# Altium PCB BoardBox.PcbDoc
Units mm, origin at the board's own origin, x right, y up, seen from the top; angles counter-clockwise.
Board outline 152.4 x 101.6 mm, 2 copper layers (Top Layer, Bottom Layer), stack 1.671 mm thick; 6 components, 79 nets, 97 pads, 92 vias.
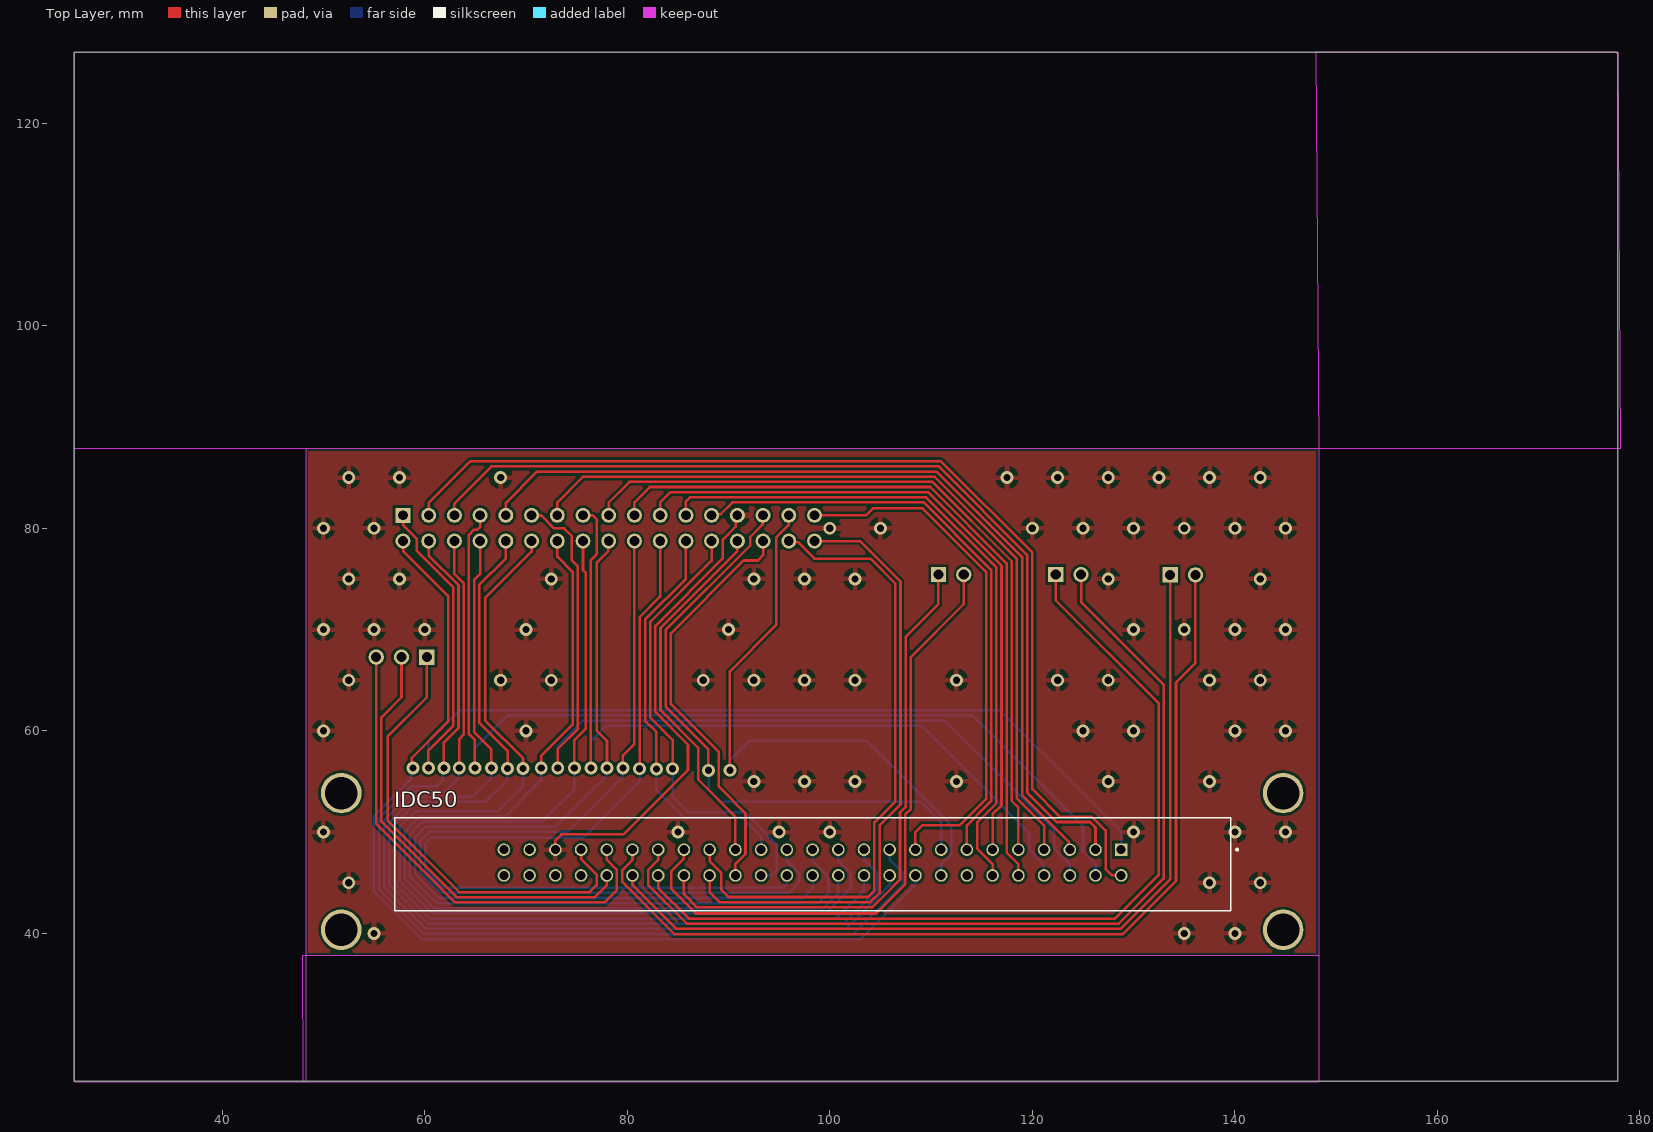
[diagram p0: Top Layer view]
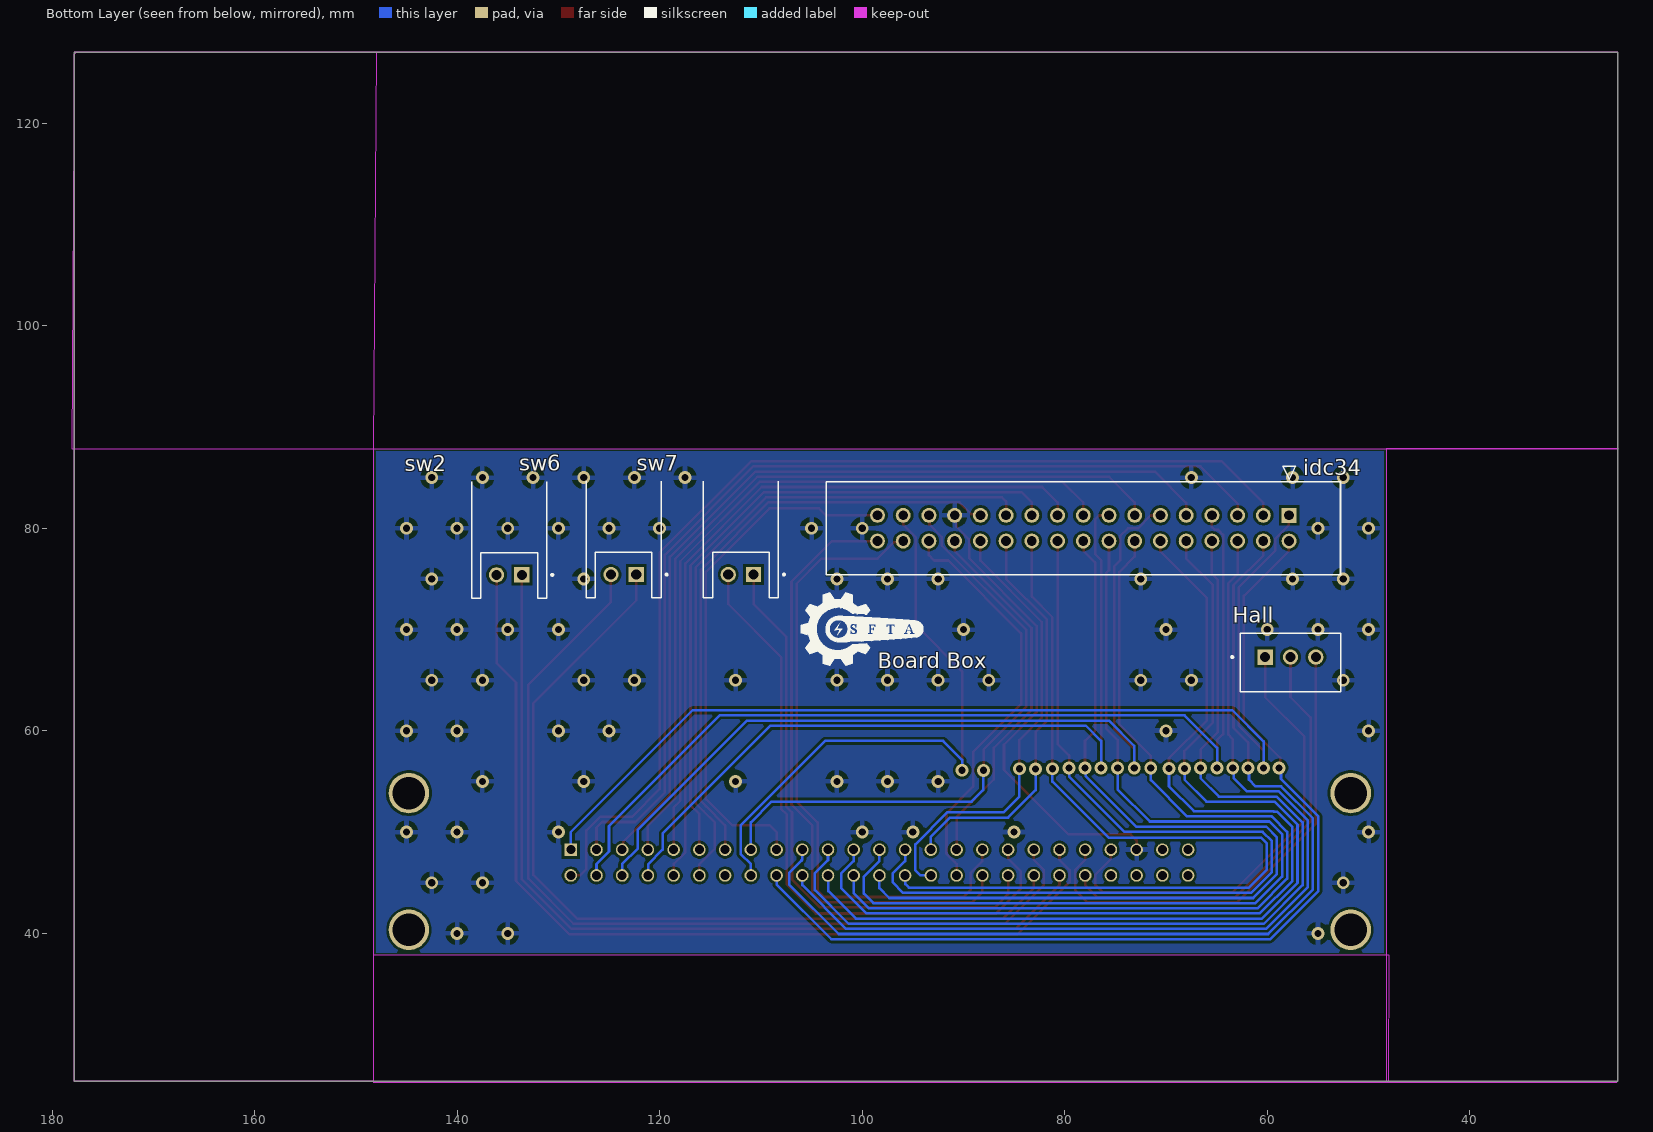
[diagram p1: Bottom Layer view, seen from below]
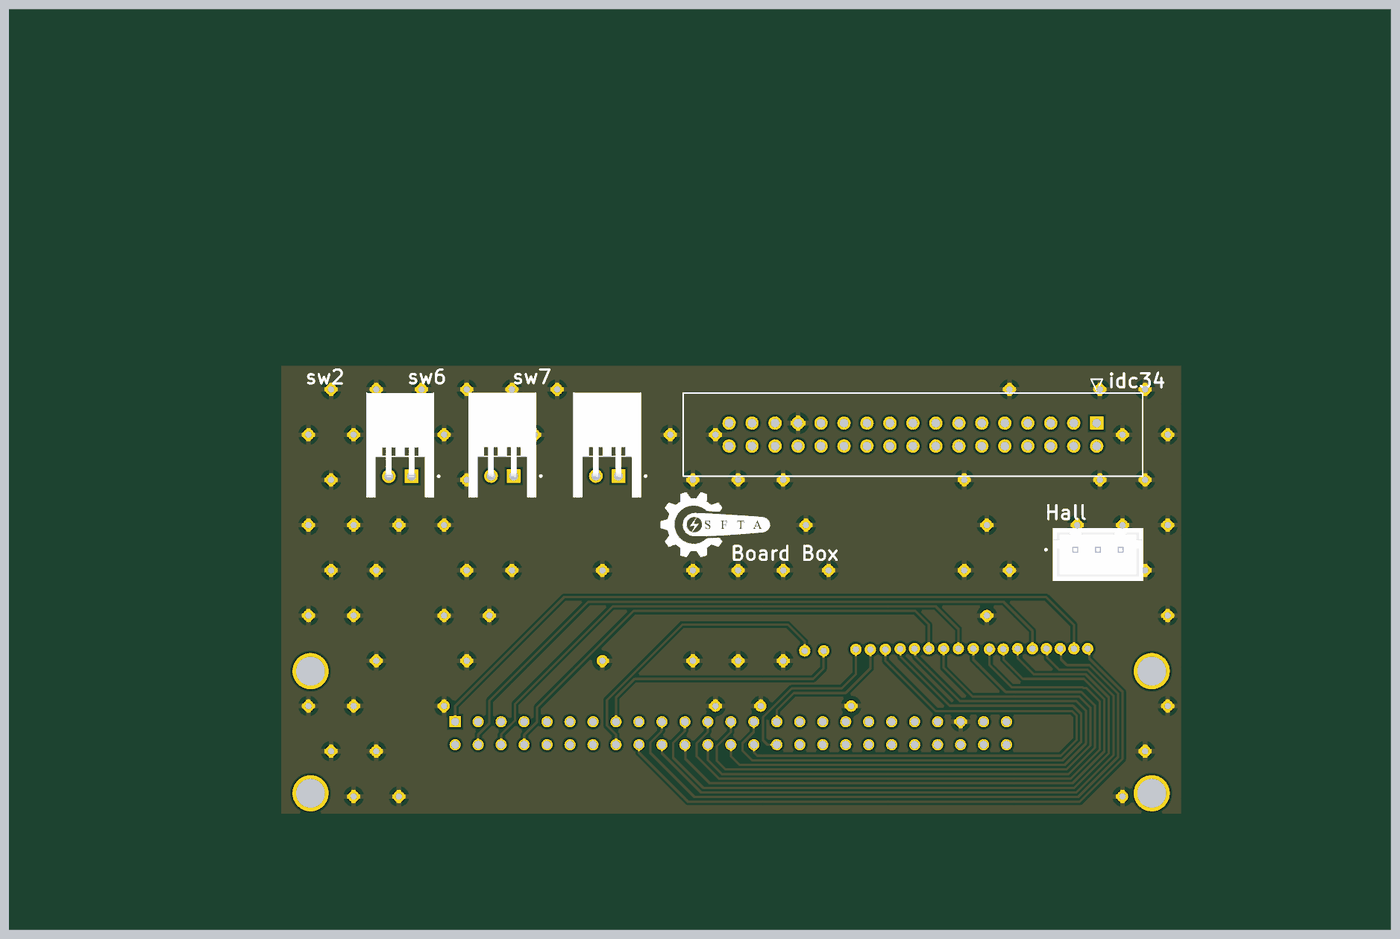
[diagram p2: 3D render of the assembled board from below, using the file's embedded part models]

## Layer stack, top to bottom
Top Solder: solder mask 0.0102, Solder Resist, Dk 3.5
Top Layer: signal copper 0.0356
Dielectric 1: dielectric 1.6, FR-4, Dk 4.8
Bottom Layer: signal copper 0.0356
Bottom Solder: solder mask 0.0102, Solder Resist, Dk 3.5

## Board outline
25.4,25.4 177.8,25.4 177.8,127 25.4,127
cut-out: 148.266,87.852 148.266,25.427 148.293,25.4 177.8,25.4 177.8,126.806 177.606,127 148,127
cut-out: 178.066,87.852 25.366,87.852 25.36,87.858 25.4,87.898 25.4,127 177.8,127
cut-out: 48.266,87.852 48.266,25.292 25.508,25.292 25.4,25.4 25.4,87.898
cut-out: 47.974,37.852 148.266,37.852 148.266,25.292 48.03,25.292

## Design rules (kind name [scope] priority, off if disabled: settings)
AssemblyTestPointUsage [All] p1: isadvanced=TRUE
AssemblyTestpoint [All] p1: isadvanced=TRUE testpointundercomponent=TRUE minsize=1.016 maxsize=2.54 preferedsize=1.524 minholesize=0 maxholesize=1.016 preferedholesize=0.813 testpointgrid=0.025 usegrid=TRUE gridtolerance=0 allowsidetop=TRUE allowsidebottom=TRUE
Clearance Clearance_1 [OnMid vs OnMid] p1: gap=0.254 ignorepadtopadclearanceinfootprint=FALSE sourcerule=37 cellrowname=All cellrowtype=0 cellcolname=All cellcoltype=0 innerlayers=TRUE
Clearance Clearance_2 [(ExistsOnLayer('Top Layer') Or ExistsOnLayer('Bottom Layer')) vs (ExistsOnLayer('Top Layer') Or ExistsOnLayer('Bottom Layer'))] p2: gap=0.254 ignorepadtopadclearanceinfootprint=FALSE sourcerule=37 cellrowname=All cellrowtype=0 cellcolname=All cellcoltype=0 outerlayers=TRUE
Clearance [All] p3: gap=0.254 ignorepadtopadclearanceinfootprint=FALSE ismatrix=TRUE
ComponentClearance [All] p1: isadvanced=TRUE gap=0.254 collisioncheckmode=3 verticalgap=0.254 showdistances=FALSE
FabricationTestPointUsage [All] p1: isadvanced=TRUE valid=0 allowmultiple=FALSE
FabricationTestpoint [All] p1: isadvanced=TRUE side=3 testpointundercomponent=TRUE minsize=1.016 maxsize=2.54 preferedsize=1.524 minholesize=0 maxholesize=1.016 preferedholesize=0.813 testpointgrid=0.025 allowsidetop=TRUE allowsidebottom=TRUE usegrid=TRUE gridtolerance=0
FanoutControl Fanout_BGA [IsBGA] p1: isadvanced=TRUE bgadir=Out bgaviamode=Centered fanoutstyle=Auto fanoutdirection=Alternating viagrid=0.025 // Fanout_BGA (Default Rule)
FanoutControl Fanout_LCC [IsLCC] p2: isadvanced=TRUE bgadir=Out bgaviamode=Centered fanoutstyle=Auto fanoutdirection=Alternating viagrid=0.025 // Fanout_LCC (Default Rule)
FanoutControl Fanout_SOIC [IsSOIC] p3: isadvanced=TRUE bgadir=Out bgaviamode=Centered fanoutstyle=Auto fanoutdirection=Alternating viagrid=0.025 // Fanout_SOIC (Default Rule)
FanoutControl Fanout_Small [(CompPinCount < 5)] p4: isadvanced=TRUE bgadir=Out bgaviamode=Centered fanoutstyle=Auto fanoutdirection=OutThenIn viagrid=0.025 // Fanout_Small (Default Rule)
FanoutControl Fanout_Default [All] p5: isadvanced=TRUE bgadir=Out bgaviamode=Centered fanoutstyle=Auto fanoutdirection=Alternating viagrid=0.025 // Fanout_Default (Default Rule)
Height [All] p1: isadvanced=TRUE minheight=0 maxheight=25.4 prefheight=12.7
HoleSize [All] p1: isadvanced=TRUE absolutevalues=TRUE maxlimit=2.54 minlimit=0.4 maxpercent=80.000 minpercent=20.000
HoleToHoleClearance [All] p1: isadvanced=TRUE gap=0.254 allowstackedmicrovias=TRUE
LayerPairs [All] p1: isadvanced=TRUE enforce=TRUE
MinimumSolderMaskSliver [All] p1: isadvanced=TRUE minsoldermaskwidth=0.254
NetAntennae [All] p1: isadvanced=TRUE netantennaetolerance=0
PasteMaskExpansion [All] p1: isadvanced=TRUE expansion=0
PlaneClearance [All] p1: isadvanced=TRUE clearance=0.508
PlaneConnect [All] p1: isadvanced=TRUE planeconnectstyle=Relief reliefexpansion=0.508 reliefentries=4 reliefconductorwidth=0.254 reliefairgap=0.254
PolygonConnect [All] p1: connectstyle=Relief reliefconductorwidth=0.5 reliefentries=4 polygonreliefangle="90 Angle" airgapwidth=0.5
RoutingCorners [All] p1: isadvanced=TRUE cornerstyle=45-Degree minsetback=2.54 maxsetback=2.54
RoutingPriority [All] p1: isadvanced=TRUE routingpriority=0
RoutingVias [All] p1: holewidth=0.711 width=1.27 viastyle="Through Hole" minholewidth=0.711 minwidth=1.27 maxholewidth=0.711 maxwidth=1.27
ShortCircuit [All] p1: isadvanced=TRUE allowed=FALSE
SilkToSilkClearance [All] p1: isadvanced=TRUE silktosilkclearance=0.254
SilkToSolderMaskClearance [IsPad] p1: isadvanced=TRUE minsilkscreentomaskgap=0.254 clearancetoexposedcopper=TRUE
SolderMaskExpansion [All] p1: isadvanced=TRUE expansion=0.102 istentingtop=FALSE
SupplyNets "Schematic Supply Nets" [InNet('+12')] p1: isadvanced=TRUE voltage=0.000
UnRoutedNet [All] p1: isadvanced=TRUE
UnpouredPolygon [All] p1: isadvanced=TRUE
Width [All] p1: maxlimit=0.254 minlimit=0.254 preferedwidth=0.254
4 further rules are at their usual default settings.

## Classes and differential pairs
component class U_ZK-SJ20: zk
component class U_dc_to_dc: dc_dc
component class U_BordBox: Hall idc34 IDC50

## Components (designator, comment, footprint, x,y, rotation, side; value= is the part's Value field where it differs from the comment)
Hall "B3B-XH-A" JST_B3B-XH-A 57.709,66.753 r0 bottom
idc34 "1-1761608-1" TYCO_1-1761608-1 57.852,78.74 r180 bottom
IDC50 "1-1761686-5" TE_1-1761686-5 128.778,48.26 r180 top
sw2 "S2B-XH-A" JST_S2B-XH-A 134.857,81.102 r0 bottom
sw6 "S2B-XH-A" JST_S2B-XH-A 123.561,81.129 r0 bottom
sw7 "S2B-XH-A" JST_S2B-XH-A 111.975,81.129 r0 bottom

## Footprints (in the part's own frame and the unit in brackets; to place one, negate y for a bottom-side part, rotate by r counter-clockwise, add the part's x,y. Pads: shape width x height; smd on the part's side, far side on the other; paste and mask are expansions set on the pad)
JST_B3B-XH-A [mm]
  rect 1.508x1.508 / inner round 1.508 / far side rect 1.508x1.508 hole 1: 1(2.5,-0.525)
  round 1.508 hole 1: 2(0,-0.525) 3(-2.5,-0.525)
  silkscreen extent -4.95,-2.88 5.85,2.87, body extent -4.95,-2.88 4.95,2.88, height 7
JST_S2B-XH-A [mm]
  rect 1.508x1.508 / inner round 1.508 / far side rect 1.508x1.508 hole 1: 1(-1.25,5.7)
  round 1.508 hole 1: 2(1.25,5.7)
  silkscreen extent -4.35,-3.5 3.7,8, body extent -3.7,-3.5 3.7,8, height 6.1
TE_1-1761686-5 [mm]
  rect 1.24x1.24 hole 0.89: 1(0,0)
  round 1.24 hole 0.89: 2(0,2.54) 3(2.54,0) 4(2.54,2.54) 5(5.08,0) 6(5.08,2.54) 7(7.62,0) 8(7.62,2.54) 9(10.16,0) 10(10.16,2.54) 11(12.7,0) 12(12.7,2.54) 13(15.24,0) 14(15.24,2.54) 15(17.78,0) 16(17.78,2.54) 17(20.32,0) 18(20.32,2.54) 19(22.86,0) 20(22.86,2.54) 21(25.4,0) 22(25.4,2.54) 23(27.94,0) 24(27.94,2.54) 25(30.48,0) 26(30.48,2.54) 27(33.02,0) 28(33.02,2.54) 29(35.56,0) 30(35.56,2.54) 31(38.1,0) 32(38.1,2.54) 33(40.64,0) 34(40.64,2.54) 35(43.18,0) 36(43.18,2.54) 37(45.72,0) 38(45.72,2.54) 39(48.26,0) 40(48.26,2.54) 41(50.8,0) 42(50.8,2.54) 43(53.34,0) 44(53.34,2.54) 45(55.88,0) 46(55.88,2.54) 47(58.42,0) 48(58.42,2.54) 49(60.96,0) 50(60.96,2.54)
  silkscreen extent -11.55,-3.18 71.75,6.04
TYCO_1-1761608-1 [mil]
  rect 58x58 / inner round 58 / far side rect 58x58 hole 38 mask+4.02: 1(0,100)
  round 58 hole 38 mask+4.02: 2(0,0) 3(-100,100) 4(-100,0) 5(-200,100) 6(-200,0) 7(-300,100) 8(-300,0) 9(-400,100) 10(-400,0) 11(-500,100) 12(-500,0) 13(-600,100) 14(-600,0) 15(-700,100) 16(-700,0) 17(-800,100) 18(-800,0) 19(-900,100) 20(-900,0) 21(-1000,100) 22(-1000,0) 23(-1100,100) 24(-1100,0) 25(-1200,100) 26(-1200,0) 27(-1300,100) 28(-1300,0) 29(-1400,100) 30(-1400,0) 31(-1500,100) 32(-1500,0) 33(-1600,100) 34(-1600,0)
  silkscreen extent -1800,-131 200,291

## Part data
Hall: "Connector Header Through Hole 3 position 0.098 (2.50mm)", Package=None, Check_prices=https://www.snapeda.com/parts/B3B-XH-A/JST+Sales+America+Inc./view-part/?ref=eda, MF="JST Sales", MP=B3B-XH-A, SnapEDA_Link=https://www.snapeda.com/parts/B3B-XH-A/JST+Sales+America+Inc./view-part/?ref=snap
idc34: "IDC LOW PRO HDR 34P VERT SHT L", Package=None, Check_prices=https://www.snapeda.com/parts/117616081/TE+Connectivity/view-part/?ref=eda, MF="TE Connectivity", MP=117616081, SnapEDA_Link=https://www.snapeda.com/parts/117616081/TE+Connectivity/view-part/?ref=snap
IDC50 sw2 sw6 sw7: Package=None, Availability=Unavailable, Price=None
  IDC50: MP=1-1761686-5
  sw2 sw6 sw7: MP=S2B-XH-A

## Free pads (board coordinates)
  round 4 hole 3.2: ""(51.766,40.352) ""(51.766,53.852) ""(144.766,40.352) ""(144.766,53.852)

## Via types
v1: diameter 1.27, hole 0.711, Top Layer to Bottom Layer, 92 vias

## Nets (pads, with @x,y where several pads share a name; then routed paths per layer and width w, separated by ;. In a path a pad name is that pad's centre, name@x,y a point inside that pad or via, vN(x,y) a via of type N, cw(c..) or ccw(c..) an arc to the next point about the centre after c; other vN are vias at no path point)
1: idc34.1 IDC50.1 | length 107.1
  Top Layer w0.254: idc34.1 57.872,81.26 57.872,80.311 59.21,78.973 59.21,77.79 62.83,74.17 62.83,60.508 60.368,58.045 v1(60.368,56.334)
  Bottom Layer w0.254: v1(60.368,56.334) 60.368,58.958 63.442,62.032 116.746,62.032 128.778,50 IDC50.1
2: idc34.3 IDC50.2 | length 104.2
  Top Layer w0.254: idc34.3 60.392,82.516 64.49,86.614 110.972,86.614 120,77.586 120,54.234 122.726,51.508 125.887,51.508 127.239,50.156 127.239,46.34 127.859,45.72 IDC50.2
3: idc34.5 IDC50.3 | length 96.7
  Top Layer w0.254: idc34.5 62.932,82.442 66.596,86.106 110.761,86.106 119.492,77.375 119.492,53.895 122.387,51 125.676,51 126.238,50.438 IDC50.3
4: idc34.7 IDC50.4 | length 98.8
  Top Layer w0.254: v1@64.954,56.648 64.954,59.085 64.354,59.685 64.354,79.34 64.872,79.858 65.202,79.858 65.472,80.128 idc34.7
  Bottom Layer w0.254: v1(64.954,56.341) 64.954,58.324 68.154,61.524 114.069,61.524 125,50.593 125,48.082 126.238,46.844 IDC50.4
5: idc34.9 IDC50.5 | length 87.8
  Top Layer w0.254: idc34.9 68.012,82.516 71.094,85.598 110.551,85.598 118.984,77.165 118.984,53.655 123.585,49.054 123.585,48.373 IDC50.5
6: idc34.11 IDC50.6 | length 91.1
  Top Layer w0.254: idc34.11 70.573,81.259 71.521,81.259 72.779,80 73.777,80 74.508,79.269 74.508,76.856 75.124,76.24 75.124,60.183 73.139,58.198 v1(73.139,56.341)
  Bottom Layer w0.254: v1@73.139,55.935 73.139,58.517 75.638,61.016 111.383,61.016 122.159,50.24 122.159,48.383 123.698,46.844 IDC50.6
7: idc34.13 IDC50.7 | length 80.9
  Top Layer w0.254: idc34.13 73.092,82.55 75.632,85.09 110.34,85.09 118.476,76.954 118.476,53.33 121.158,50.648 IDC50.7
8: idc34.15 IDC50.8 | length 82
  Top Layer w0.254: idc34.15 75.651,81.261 76.601,81.261 77,80.862 77,77.444 76.412,76.856 v1(76.412,56.341)
  Bottom Layer w0.254: v1(76.412,56.341) 76.412,58.994 77.927,60.508 109.062,60.508 119.71,49.86 119.71,48.26 121.147,46.823 121.147,45.731 IDC50.8
9: idc34.17 IDC50.9 | length 73.9
  Top Layer w0.254: idc34.17 78.172,82.55 80.204,84.582 110.13,84.582 117.968,76.744 117.968,53.076 118.618,52.426 IDC50.9
10: idc34.19 IDC50.10 | length 73.1
  Top Layer w0.254: idc34.19 80.712,82.55 82.236,84.074 109.92,84.074 117.46,76.534 117.46,48.002 118.607,46.855 118.607,45.731 IDC50.10
11: idc34.21 IDC50.11 | length 66.8
  Top Layer w0.254: idc34.21 83.252,82.55 84.268,83.566 109.709,83.566 116.46,76.815 116.952,76.323 116.952,52.639 116.078,51.765 IDC50.11
12: idc34.23 IDC50.12 | length 66.9
  Top Layer w0.254: idc34.23 85.792,82.657 86.193,83.058 109.499,83.058 115.952,76.605 116.444,76.113 116.444,52.849 115.654,52.06 114.539,50.944 114.539,48.369 116.078,46.83 IDC50.12
13: idc34.25 IDC50.13 | length 59.4
  Top Layer w0.254: idc34.25@88.439,81.387 89.225,81.387 90.388,82.55 109.288,82.55 115.444,76.394 115.936,75.902 115.936,53.06 115.444,52.568 113.538,50.662 IDC50.13
15: idc34.29 IDC50.15 | length 59.8
  Top Layer w0.254: v1(88.028,56.1) 88.016,56.111 88.016,58.161 83.795,62.382 83.795,69.935 92.144,78.285 92.144,79.15 93.357,80.363 93.357,81.225 idc34.29
  Bottom Layer w0.254: v1(88.028,56.1) 88.052,56.076 88.052,54.135 89.186,53 108.95,53 110.998,50.952 IDC50.15
16: idc34.31 IDC50.16 | length 60.1
  Top Layer w0.254: v1(90.132,56.101) 90.132,65.872 94.709,70.45 94.709,79.083 95.937,80.311 95.937,81.265 idc34.31
  Bottom Layer w0.254: v1(90.132,56.101) 90.132,57.132 92,59 103.669,59 111.999,50.67 111.999,47.831 110.998,46.83 IDC50.16
17: idc34.33 IDC50.17 | length 52.3
  Top Layer w0.254: idc34.33 103.572,81.28 104.257,81.965 109.155,81.965 115.428,75.692 115.428,53.27 112.82,50.662 109.12,50.662 108.458,50 IDC50.17
18: idc34.2 IDC50.18 | length 97.9
  Top Layer w0.254: idc34.2 57.87,78.722 57.87,77.771 62.322,73.319 62.322,60.939 58.725,57.342 58.725,56.462 v1(58.844,56.343)
  Bottom Layer w0.254: v1@58.649,56.149 58.649,55.243 54.984,51.578 54.984,44.142 59.698,39.428 103.055,39.428 108.458,44.831 IDC50.18
19: idc34.4 IDC50.19 | length 99.9
  Top Layer w0.254: idc34.4 60.392,77.326 63.338,74.38 63.338,60.298 61.892,58.851 v1(61.892,56.342)
  Bottom Layer w0.254: v1(61.892,56.342) 61.807,56.257 61.807,55.173 61.158,54.524 58.649,54.524 55.492,51.367 55.492,44.353 59.909,39.936 102.314,39.936 107.209,44.83 107.209,45.968 105.991,47.186 105.991,47.227 105.918,47.301 IDC50.19
20: idc34.6 IDC50.20 | length 94
  Top Layer w0.254: idc34.6 62.932,75.505 63.846,74.59 63.846,59.62 63.416,59.189 v1(63.416,56.341)
  Bottom Layer w0.254: v1(63.416,56.341) 63.325,56.25 63.325,55.325 62.016,54.016 58.859,54.016 56,51.157 56,44.563 60.119,40.444 101.582,40.444 105.918,44.78 IDC50.20
21: idc34.8 IDC50.21 | length 98.2
  Top Layer w0.254: idc34.8 65.472,75.472 64.872,74.872 64.872,59.886 66.591,58.167 v1@66.591,56.205
  Bottom Layer w0.254: v1(66.591,56.341) 66.591,55.317 64.782,53.508 59.069,53.508 56.508,50.947 56.508,44.774 60.33,40.952 101.344,40.952 104.67,44.278 104.67,45.946 103.378,47.238 IDC50.21
22: idc34.10 IDC50.22 | length 95
  Top Layer w0.254: idc34.10 68.012,77.012 65.38,74.38 65.38,60.831 68.18,58.031 v1(68.18,56.293)
  Bottom Layer w0.254: v1@68.15,56.264 68.15,55.15 66,53 59.28,53 57.016,50.736 57.016,44.984 60.54,41.46 100.629,41.46 103.333,44.165 103.333,45.675 IDC50.22
23: idc34.12 IDC50.23 | length 98.1
  Top Layer w0.254: v1(69.704,56.293) 69.704,57.296 65.964,61.036 65.964,73.101 70.552,77.689 idc34.12
  Bottom Layer w0.254: v1(69.704,56.293) 69.704,54.513 67.255,52.064 59.383,52.064 59.319,52 58.998,52 57.524,50.526 57.524,45.194 60.75,41.968 99.583,41.968 102.074,44.459 102.074,45.9 100.838,47.136 IDC50.23
24: idc34.14 IDC50.24 | length 91.8
  Top Layer w0.254: v1(71.502,56.341) 71.502,57.502 74.616,60.616 74.616,75.692 73.092,77.216 idc34.14
  Bottom Layer w0.254: v1@71.502,56.013 71.502,55.144 67.914,51.556 59.593,51.556 59.579,51.542 59.542,51.542 58.032,50.032 58.032,45.405 60.961,42.476 99.314,42.476 100.838,44 IDC50.24
25: idc34.16 IDC50.25 | length 95.1
  Top Layer w0.254: v1(74.776,56.341) 74.776,59.117 75.904,60.246 75.904,75.588 75.632,75.861 idc34.16
  Bottom Layer w0.254: v1(74.776,56.341) 74.776,54.221 71.603,51.048 59.792,51.048 58.54,49.796 58.54,45.615 61.171,42.984 98.884,42.984 99.837,43.937 99.837,45.597 98.298,47.136 IDC50.25
26: idc34.18 IDC50.26 | length 90.9
  Top Layer w0.254: v1(78,56.341) 78,59 77,60 77,76.634 78.138,77.771 78.138,78.706 idc34.18
  Bottom Layer w0.254: v1@77.916,56.257 77.916,55.497 72.959,50.54 60.103,50.54 59.048,49.485 59.048,45.841 61.397,43.492 97.331,43.492 98.298,44.459 IDC50.26
27: idc34.20 IDC50.27 | length 91.9
  Top Layer w0.254: v1(79.577,56.325) 79.577,57.577 80.706,58.706 80.706,71.424 80.712,71.43 idc34.20
  Bottom Layer w0.254: v1(79.577,56.325) 79.537,56.285 79.537,55.457 74.112,50.032 60.462,50.032 59.556,49.126 59.556,46.057 61.613,44 95.95,44 97,45.05 97,45.908 95.758,47.15 IDC50.27
28: idc34.22 IDC50.28 | length 88.3
  Top Layer w0.254: v1(81.214,56.262) 81.214,71.214 83.252,73.252 idc34.22
  Bottom Layer w0.254: v1(81.214,56.262) 81.214,55 75.644,49.43 60.579,49.43 60.064,48.915 60.064,46.268 61.824,44.508 95.378,44.508 95.738,44.868 95.738,45.7 IDC50.28
29: idc34.24 IDC50.29 | length 40.3
  Top Layer w0.254: v1(82.875,56.24) 82.875,59.864 81.763,60.977 81.763,70.971 85.792,75 idc34.24
  Bottom Layer w0.254: v1(82.875,56.24) 82.875,54.158 85.598,51.435 91.345,51.435 93.218,49.562 IDC50.29
30: idc34.26 IDC50.30 | length 45.2
  Top Layer w0.254: v1(84.476,56.262) 84.476,59.103 82.271,61.308 82.271,70.76 88.332,76.822 idc34.26
  Bottom Layer w0.254: v1(84.476,56.262) 84.476,53.508 86.021,51.963 91.567,51.963 94.757,48.773 94.757,46.221 94.259,45.723 IDC50.30@93.221,45.723
31: idc34.28 IDC50.31 | length 36.7
  Top Layer w0.254: IDC50.31 90.678,51.508 87.012,55.174 87.012,58.327 83.287,62.052 83.287,70.162 90.872,77.748 idc34.28
32: idc34.30 IDC50.32 | length 41.1
  Top Layer w0.254: IDC50.32 90.678,46.851 90.827,47 90.834,47 91.679,47.845 91.679,51.851 89.044,54.486 89.044,57.895 84.303,62.636 84.303,69.631 91.494,76.822 92.891,76.822 93.412,77.342 idc34.30
33: idc34.32 IDC50.33 | length 63.5
  Top Layer w0.254: IDC50.33 88.138,47.136 89.276,45.997 89.276,44.312 90,43.588 103.765,43.588 104.177,44 104.186,44 104.409,44.223 104.409,50.951 106.476,53.018 106.476,74.524 104,77 98.492,77 96.888,78.604 96.088,78.604 idc34.32
34: idc34.34 IDC50.34 | length 61
  Top Layer w0.254: IDC50.34 88.138,44.07 89.127,43.08 103.976,43.08 104.387,43.492 104.396,43.492 104.917,44.013 104.917,50.644 106.984,52.711 106.984,74.734 102.978,78.74 idc34.34
35: IDC50.35 sw7.2 | length 62.7
  Top Layer w0.254: IDC50.35 85.598,47.395 84.328,46.125 84.328,44.421 86.784,41.965 104.576,41.965 107.442,44.831 107.442,51.733 108,52.291 108,67.282 113.225,72.507 sw7.2
36: IDC50.36 sw7.1 | length 56.5
  Top Layer w0.254: IDC50.36 85.598,43.87 86.895,42.572 104.186,42.572 104.598,42.984 104.607,42.984 105.425,43.802 105.425,43.811 106.934,45.32 106.934,51.943 107.492,52.501 107.492,69.274 110.725,72.507 sw7.1
37: IDC50.37 sw6.2 | length 91.6
  Top Layer w0.254: IDC50.37 83.058,47.259 82.057,46.258 82.057,44.773 85.881,40.949 128.512,40.949 132.969,45.406 132.969,64.567 124.811,72.725 sw6.2
38: IDC50.38 sw6.1 | length 87.5
  Top Layer w0.254: IDC50.38 83.058,44.491 86.092,41.457 128.153,41.457 132.461,45.765 132.461,62.729 122.311,72.879 sw6.1
39: IDC50.39 sw2.2 | length 93.6
  Top Layer w0.254: IDC50.39 80.518,47.259 79.517,46.258 79.517,45.056 84.64,39.933 128.933,39.933 134.188,45.188 134.188,64.77 136.107,66.689 sw2.2
40: IDC50.40 sw2.1 | length 87.9
  Top Layer w0.254: IDC50.40 80.518,44.773 84.85,40.441 128.723,40.441 133.607,45.325 sw2.1
41: Hall.3 IDC50.41 | length 48.3
  Top Layer w0.254: Hall.3 55.209,50.836 62.992,43.053 77.771,43.053 78.979,44.261 78.979,46.258 77.978,47.259 IDC50.41
42: Hall.2 IDC50.42 | length 43.8
  Top Layer w0.254: Hall.2 57.709,63.314 55.728,61.333 55.728,51.036 63.202,43.561 76.744,43.561 77.978,44.795 IDC50.42
43: Hall.1 IDC50.43 | length 45.7
  Top Layer w0.254: Hall.1 60.209,63.314 56.337,59.442 56.337,51.145 63.413,44.069 76.273,44.069 76.977,44.773 76.977,45.796 75.438,47.335 IDC50.43
45: IDC50.14
46: IDC50.46
47: IDC50.47
48: IDC50.48
49: IDC50.49
50: IDC50.50
+12: 
GND: idc34.27 IDC50.45 | length 46.7
  Top Layer w0.254: IDC50.45 72.898,49.188 73.494,49.784 79.63,49.784 85.996,56.149 85.996,58.625 82.779,61.842 82.779,70.373 89.45,77.044 89.45,78.898 90.714,80.162 90.714,81.122 idc34.27
  other v1: 55,40 135,40 140,40 52.5,45 137.5,45 142.5,45 50,50 85,50 95,50 100,50 130,50 140,50 145,50 92.5,55 97.5,55 102.5,55 112.5,55 127.5,55 137.5,55 50,60 70,60 125,60 130,60 140,60 145,60 52.5,65 67.5,65 72.5,65 87.5,65 92.5,65 97.5,65 102.5,65 112.5,65 122.5,65 127.5,65 137.5,65 142.5,65 50,70 55,70 60,70 70,70 90,70 130,70 135,70 140,70 145,70 52.5,75 57.5,75 72.5,75 92.5,75 97.5,75 102.5,75 127.5,75 142.5,75 50,80 55,80 100,80 105,80 120,80 125,80 130,80 135,80 140,80 145,80 52.5,85 57.5,85 67.5,85 117.5,85 122.5,85 127.5,85 132.5,85 137.5,85 142.5,85
Netsw2_3: 
Netsw6_3: 
Netsw7_3: 
Netxh7_1: 
Netxh7_2: 
Netxh7_3: 
Netxh7_4: 
Netxh7_5: 
Netxh7_6: 
Netxh7_7: 
Netzk_61: 
Netzk_62: 
Netzk_63: 
Netzk_64: 
Netzk_65: 
Netzk_66: 
Netzk_67: 
Netzk_68: 
Netzk_69: 
Netzk_70: 
Netzk_71: 
Netzk_72: 
Netzk_73: 
Netzk_74: 
Netzk_77: 
Netzk_78: 
Out+: 
Out-: 
Vdd: IDC50.44

## Polygon pours and split planes (outlines as drawn)
GND on Bottom Layer "GND_L02_P000" (solid, pour order 0): 48.266,87.852 48.266,37.852 148.266,37.852 148.266,87.631 148.045,87.852
GND on Top Layer "GND_L01_P001" (solid, pour order 1): 148.266,87.852 48.266,87.852 48.266,37.852 148.266,37.852

## Silkscreen, mask and mechanical layers (free items; w line width, h text height)
Bottom Overlay:
  drawing of 3 lines, arcs and shapes, not listed
  text "Board Box" at 98.465,66.162 h1.52
Mechanical 1:
  circle w0.013: c144.766,40.352 r1.6
  circle w0.013: c51.766,40.352 r1.6
  circle w0.013: c144.766,53.852 r1.6
  circle w0.013: c51.766,53.852 r1.6
  lines w0.013: 48.266,37.852 48.266,87.852 148.266,87.852 148.266,37.852 48.266,37.852 ; 56.856,42.852 56.856,51.357 139.676,51.357 139.676,42.852 56.856,42.852

## Text inside footprints (layer, text, board x,y; h text height)
sw2: Mechanical 13 "PCB Edge" at 139.024,84.305 h0.81 r180
sw6: Mechanical 13 "PCB Edge" at 127.729,84.331 h0.81 r180
sw7: Mechanical 13 "PCB Edge" at 116.143,84.331 h0.81 r180